# Altium PCB Madromys.PcbDoc (part 1 of 2)
Units mm, origin at the board's own origin, x right, y up, seen from the top; angles counter-clockwise.
Board outline 61.8 x 82.5 mm, 4 copper layers (Top Layer, Plane 1, Plane 2, Bottom Layer), stack 0.781 mm thick; 86 components, 51 nets, 306 pads, 237 vias.
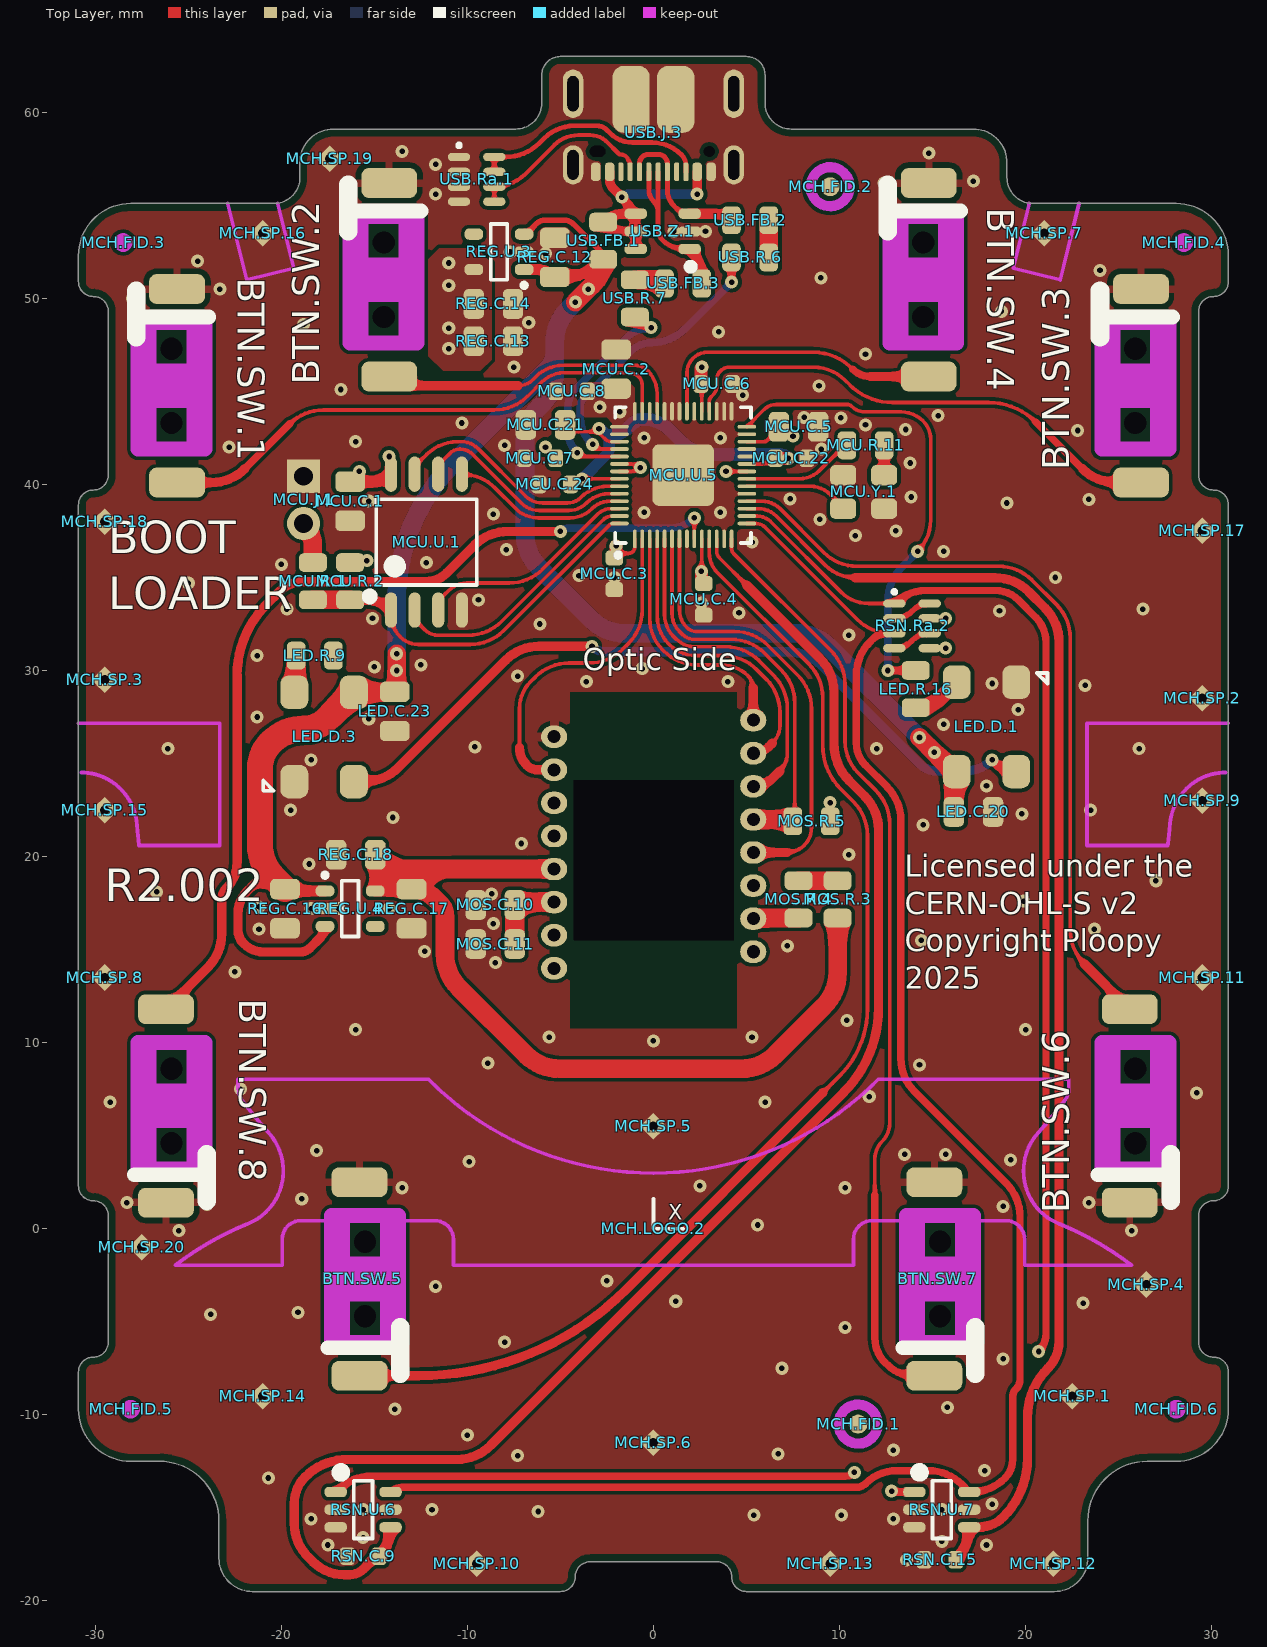
[diagram p0: Top Layer view]
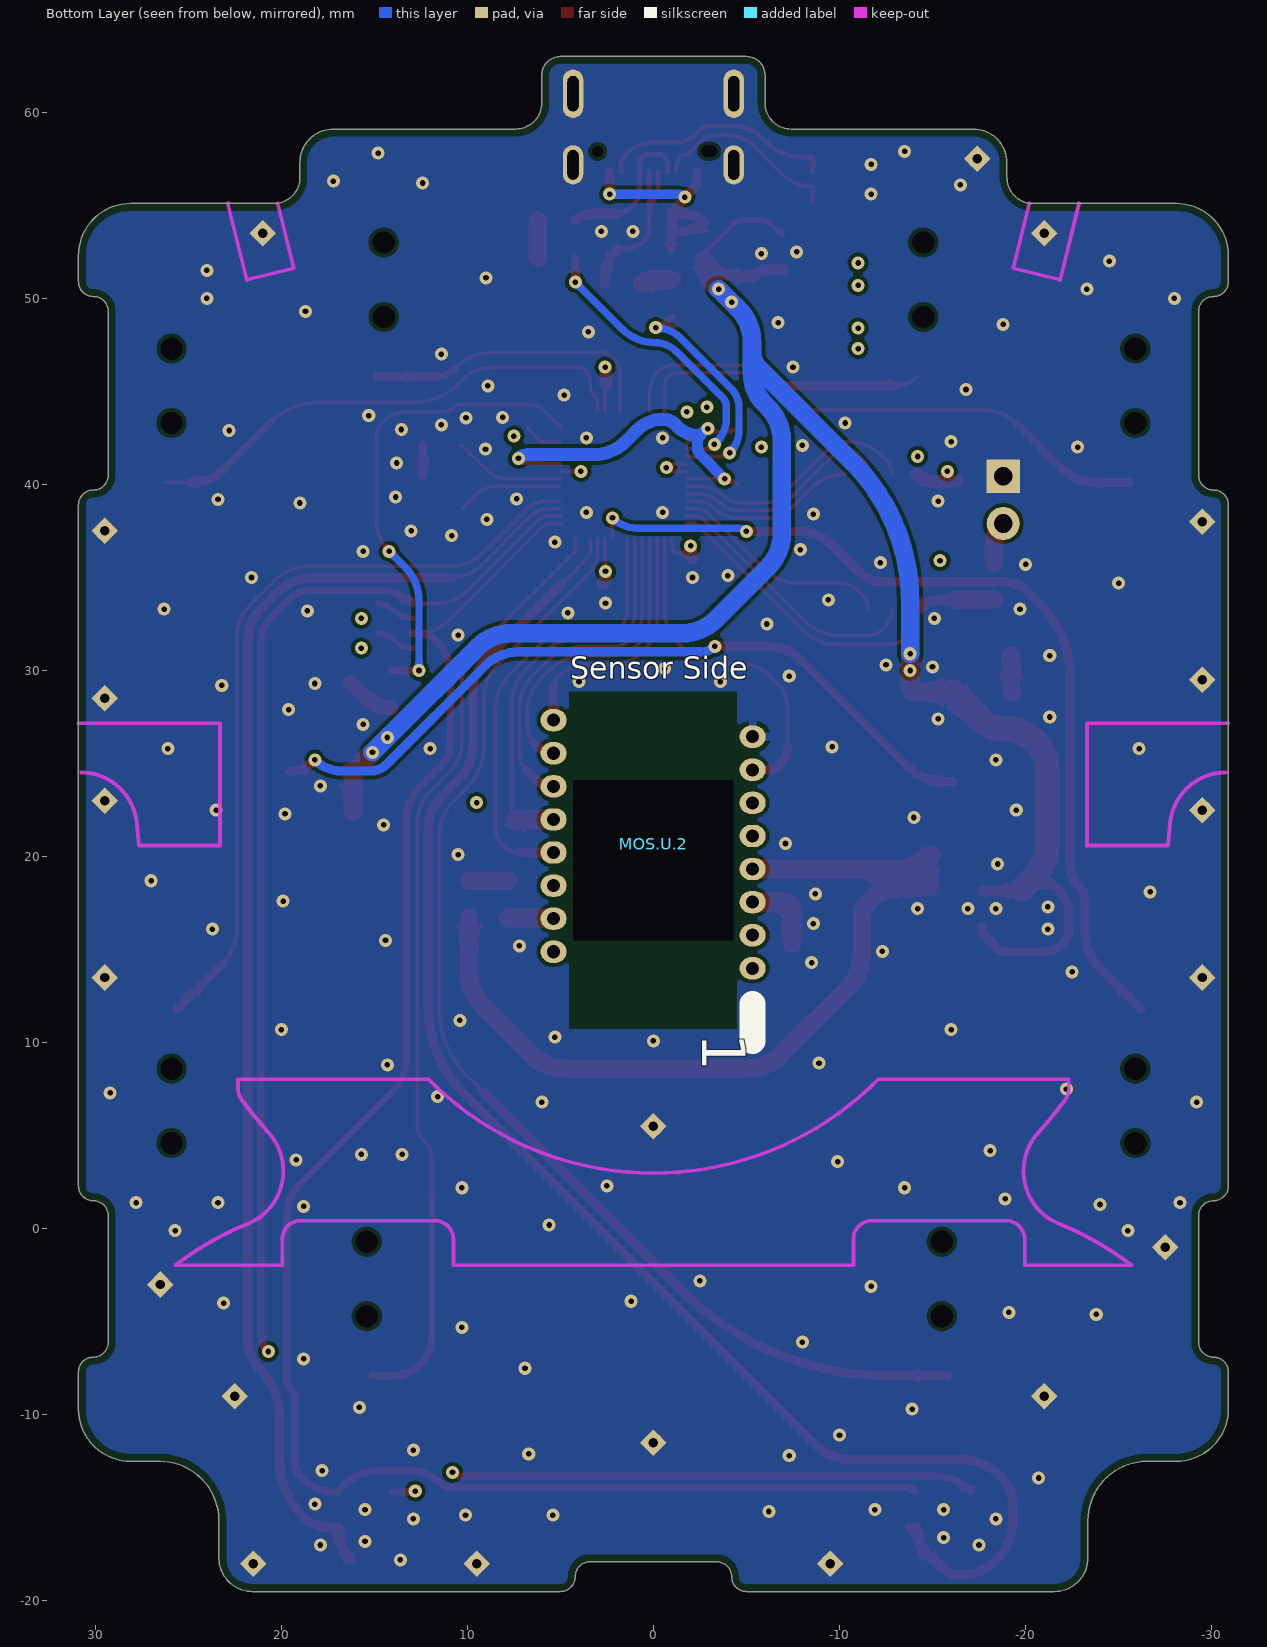
[diagram p1: Bottom Layer view, seen from below]
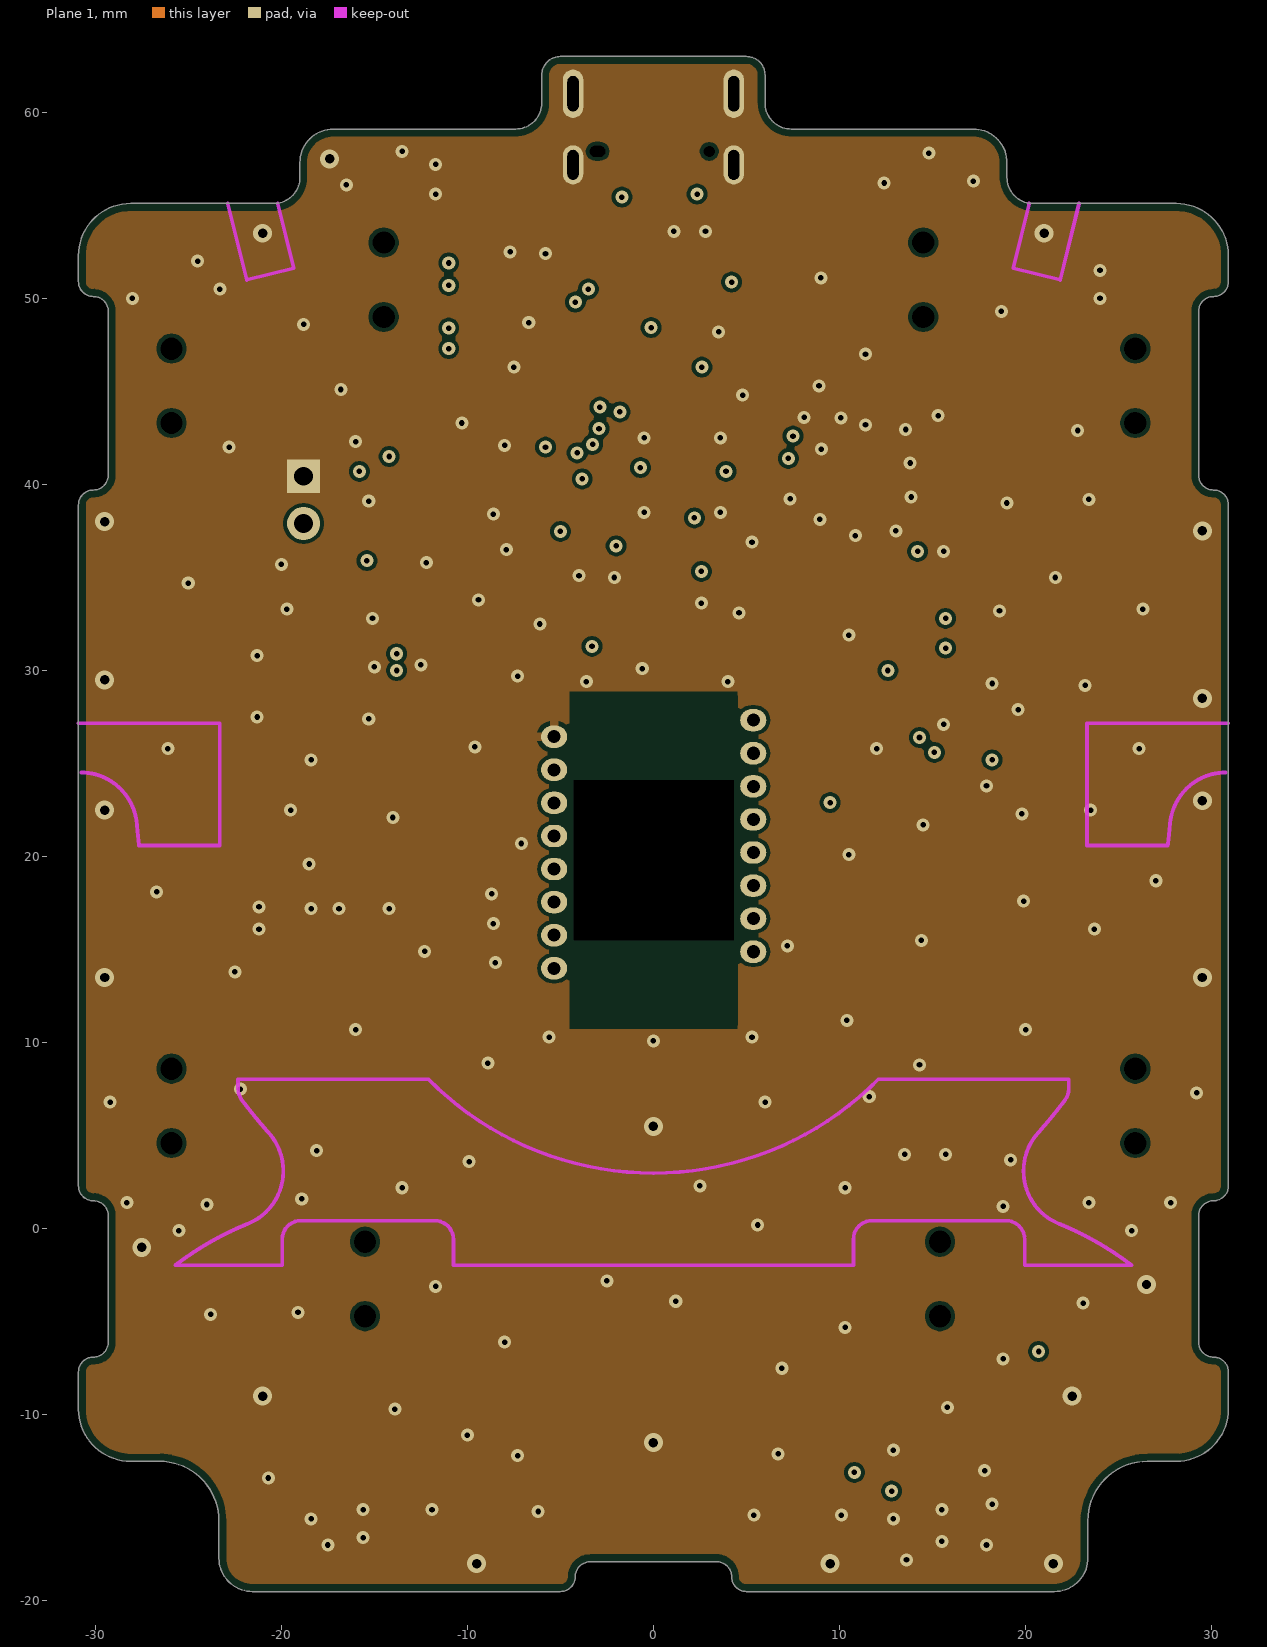
[diagram p2: Plane 1]
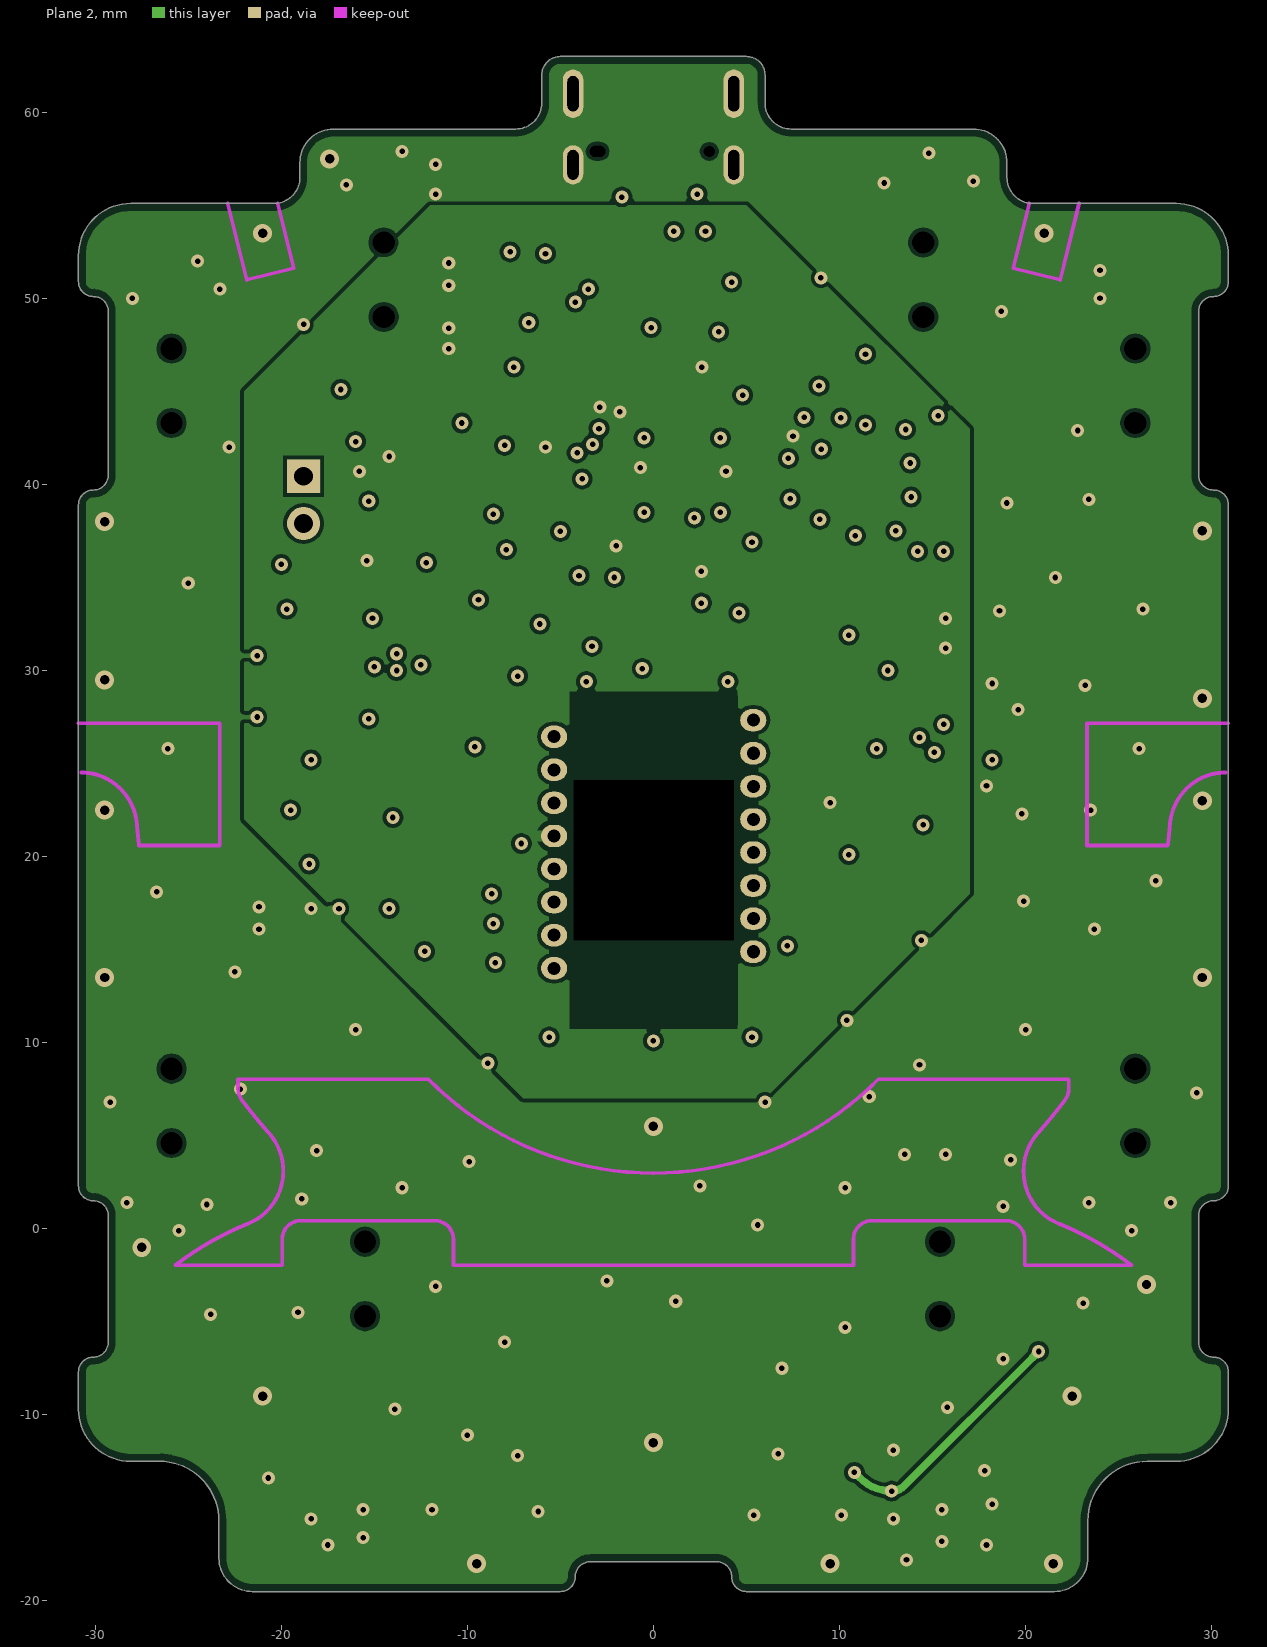
[diagram p3: Plane 2]

## Layer stack, top to bottom
Top Mask: solder mask 0.01, Solder Resist, Dk 3.5
Top Layer: signal copper 0.036
Dielectric 1: prepreg 0.127, FR-4, Dk 4.2
Plane 1: signal copper 0.036
Dielectric 4: core 0.383, Dk 4.2
Plane 2: signal copper 0.036
Dielectric 2: prepreg 0.127, Dk 4.2
Bottom Layer: signal copper 0.036
Bottom Solder: solder mask 0.01, Solder Resist, Dk 3.5

## Board outline
-30.9,-9.7 -30.9,-7.7 cw(c-30.1,-7.7) -30.1,-6.9 ccw(c-30.1,-6.1) -29.3,-6.1 -29.3,0.7 ccw(c-30.1,0.7) -30.1,1.5 cw(c-30.1,2.3) -30.9,2.3 -30.9,38.9 cw(c-30.1,38.9) -30.1,39.7 ccw(c-30.1,40.5) -29.3,40.5 -29.3,49.3 ccw(c-30.1,49.3) -30.1,50.1 cw(c-30.1,50.9) -30.9,50.9 -30.9,52.3 cw(c-28.1,52.3) -28.1,55.1 -20.4,55.1 ccw(c-20.4,56.5) -19,56.5 -19,57.3 cw(c-17.2,57.3) -17.2,59.1 -7.4,59.1 ccw(c-7.4,60.5) -6,60.5 -6,62 cw(c-5,62) -5,63 5,63 cw(c5,62) 6,62 6,60.5 ccw(c7.4,60.5) 7.4,59.1 17.2,59.1 cw(c17.2,57.3) 19,57.3 19,56.5 ccw(c20.4,56.5) 20.4,55.1 28.1,55.1 cw(c28.1,52.3) 30.9,52.3 30.9,50.9 cw(c30.1,50.9) 30.1,50.1 ccw(c30.1,49.3) 29.3,49.3 29.3,40.5 ccw(c30.1,40.5) 30.1,39.7 cw(c30.1,38.9) 30.9,38.9 30.9,2.3 cw(c30.1,2.3) 30.1,1.5 ccw(c30.1,0.7) 29.3,0.7 29.3,-6.1 ccw(c30.1,-6.1) 30.1,-6.9 cw(c30.1,-7.7) 30.9,-7.7 30.9,-9.7 cw(c28.1,-9.7) 28.1,-12.5 26.55,-12.5 ccw(c26.55,-15.7) 23.35,-15.7 23.35,-17.7 cw(c21.55,-17.7) 21.55,-19.5 5,-19.5 cw(c5,-18.7) 4.2,-18.7 ccw(c3.4,-18.7) 3.4,-17.9 -3.4,-17.9 ccw(c-3.4,-18.7) -4.2,-18.7 cw(c-5,-18.7) -5,-19.5 -21.55,-19.5 cw(c-21.55,-17.7) -23.35,-17.7 -23.35,-15.7 ccw(c-26.55,-15.7) -26.55,-12.5 -28.1,-12.5 cw(c-28.1,-9.7)

## Design rules (kind name [scope] priority, off if disabled: settings)
BoardOutlineClearance [(Not HasFootprint('SPARKGAP'))] p1: gap=0.4 ignorepadtopadclearanceinfootprint=FALSE except(0: Arc-SplitBarrior Arc-SplitContinuation Track-SplitBarrior Track-SplitContinuation Fill-SplitBarrior Fill-SplitContinuation Poly-SplitBarrior Poly-SplitContinuation Region-SplitBarrior Region-SplitContinuation Text-SplitBarrior Text-SplitContinuation)
Clearance "HighV Pads" [(InNetClass('HighV') AND (IsPad OR IsVia)) vs IsPad OR IsVia] p1: gap=0.4 ignorepadtopadclearanceinfootprint=FALSE except(0: Arc-Hole Track-Hole SMDPad-Hole THPad-Hole Via-Hole Fill-Hole Poly-Hole Region-Hole Text-Hole) // Establishes minimum clearance between bare pads that are high voltage, per IPC2221A Table 6-1, 51-100V, condition A6
Clearance Inter-Pad [IsPad vs IsPad] p2: gap=0.2 ignorepadtopadclearanceinfootprint=FALSE except(0: Arc-Hole Track-Hole SMDPad-Hole THPad-Hole Via-Hole Fill-Hole Poly-Hole Region-Hole Text-Hole)
Clearance "Spark Gaps" [InNetClass('Spark Gap') vs InNet('GND') And InPoly] p3: gap=0.635 ignorepadtopadclearanceinfootprint=FALSE except(0: Arc-Hole Track-Hole SMDPad-Hole THPad-Hole Via-Hole Fill-Hole Poly-Hole Region-Hole Text-Hole)
Clearance FIDs [Name like 'FID*'] p4: gap=1.016 ignorepadtopadclearanceinfootprint=FALSE except(0: Arc-Hole Track-Hole SMDPad-Hole THPad-Hole Via-Hole Fill-Hole Poly-Hole Region-Hole Text-Hole)
Clearance "Inner Planes" [InPoly AND OnMid] p5: gap=0.2 ignorepadtopadclearanceinfootprint=FALSE // Defines a larger clearance for planes on inner layers.
Clearance "All Planes" [InPoly] p6: gap=0.2 ignorepadtopadclearanceinfootprint=FALSE except(0: Arc-Hole Track-Hole SMDPad-Hole THPad-Hole Via-Hole Fill-Hole Poly-Hole Region-Hole Text-Hole) // Defines minimum clearance between planes on the same layer.
Clearance "Inner Layer Clearance" [OnMid vs OnMid] p7: gap=0.3 ignorepadtopadclearanceinfootprint=FALSE except(0: Arc-Hole Track-Hole SMDPad-Hole THPad-Hole Via-Hole Fill-Hole Poly-Hole Region-Hole Text-Hole) // We will give inner layers more spacing because they tend to be subject to stricter process limits.
Clearance [All] p8: gap=0.2 ignorepadtopadclearanceinfootprint=FALSE // 2 oz (70um) boards require at least 10mil spacing. We give a bit more to make sure things work well.
ComponentClearance "Terminal Block" [(HasFootprint('Phoenix 1933189 - Header')) vs (HasFootprint('Phoenix 1933189 - Header'))] p1: gap=-2.286 collisioncheckmode=3 verticalgap=0.254 showdistances=FALSE
ComponentClearance "FET/TP self Clearance" [(Name like 'Q*') Or (Name like 'TP*') vs (Name like 'Q*') Or (Name like 'TP*')] p2: gap=0.254 collisioncheckmode=3 verticalgap=0.254 showdistances=FALSE
ComponentClearance [Not ((Name like 'H*') Or (Name like 'FID*') Or (Name like 'SP*')) vs Not ((Name like 'H*') Or (Name like 'FID*') Or (Name like 'SP*'))] p3: gap=0.5 collisioncheckmode=3 verticalgap=0.5 showdistances=FALSE
DiffPairsRouting [All] p1: maxlimit=0.508 minlimit=0.279 mostfreqgap=0.381 toplayer_prefgap=0.279 toplayer_minwidth=0.279 toplayer_maxwidth=0.508 toplayer_prefwidth=0.381 midlayer2_mingap=0.305 midlayer2_minwidth=0.305 midlayer2_maxwidth=0.508 midlayer2_prefwidth=0.381 midlayer3_prefgap=0.279 midlayer3_minwidth=0.279 midlayer3_maxwidth=0.508 midlayer3_prefwidth=0.381 bottomlayer_prefgap=0.279 bottomlayer_minwidth=0.279 bottomlayer_maxwidth=0.508 bottomlayer_prefwidth=0.381 substack1={D919DD2D-F60F-4B9F-B5AE-F3E69D6E268F} toplayer_{d919dd2d-f60f-4b9f-b5ae-f3e69d6e268f}_minwidth=0.381 toplayer_{d919dd2d-f60f-4b9f-b5ae-f3e69d6e268f}_maxwidth=0.381 toplayer_{d919dd2d-f60f-4b9f-b5ae-f3e69d6e268f}_prefwidth=0.381 midlayer2_{d919dd2d-f60f-4b9f-b5ae-f3e69d6e268f}_minwidth=0.381 midlayer2_{d919dd2d-f60f-4b9f-b5ae-f3e69d6e268f}_maxwidth=0.381 midlayer2_{d919dd2d-f60f-4b9f-b5ae-f3e69d6e268f}_prefwidth=0.381 midlayer3_{d919dd2d-f60f-4b9f-b5ae-f3e69d6e268f}_minwidth=0.381 midlayer3_{d919dd2d-f60f-4b9f-b5ae-f3e69d6e268f}_maxwidth=0.381 midlayer3_{d919dd2d-f60f-4b9f-b5ae-f3e69d6e268f}_prefwidth=0.381 bottomlayer_{d919dd2d-f60f-4b9f-b5ae-f3e69d6e268f}_minwidth=0.381 bottomlayer_{d919dd2d-f60f-4b9f-b5ae-f3e69d6e268f}_maxwidth=0.381 bottomlayer_{d919dd2d-f60f-4b9f-b5ae-f3e69d6e268f}_prefwidth=0.381 maxuncoupledlength=12.7
Height [All] p1: minheight=0 maxheight=41 prefheight=12.7
HoleSize [All] p1: absolutevalues=TRUE maxlimit=100 minlimit=0.3 maxpercent=80.000 minpercent=20.000
HoleToHoleClearance [All] p1: gap=0.6 allowstackedmicrovias=TRUE
LayerPairs [All] p1: enforce=FALSE
MinimumSolderMaskSliver [All] p1: minsoldermaskwidth=0.09
NetAntennae [Not (HasFootprint('BALANCE_RESISTOR'))] p1: netantennaetolerance=0
PasteMaskExpansion [All] p1: expansion=-0.025
PlaneClearance [All] p1: clearance=0.3
PlaneConnect [All] p1: pad.planeconnectstyle=Relief pad.reliefexpansion=0.5 pad.reliefentries=4 pad.reliefconductorwidth=0.5 pad.reliefairgap=0.25 via.planeconnectstyle=Direct via.reliefexpansion=0.5 via.reliefentries=4 via.reliefconductorwidth=0.5 via.reliefairgap=0.25
PolygonConnect "PolygonConnect Spark Gap" [HasFootprint('SparkGap')] p1: connectstyle=Direct reliefconductorwidth=0.254 reliefentries=4 polygonreliefangle="90 Angle" airgapwidth=0.254 // This rule makes it so spark gaps get direct connections to ground planes.
PolygonConnect PolygonConnect_GND [All vs InNet('GND')] p2: connectstyle=Direct reliefconductorwidth=0.5 reliefentries=4 polygonreliefangle="90 Angle" airgapwidth=0.25 // This rule specifies all vias and holes connected to a GND plane have direct connections.
PolygonConnect [All] p3: connectstyle=Direct reliefconductorwidth=0.5 reliefentries=4 polygonreliefangle="90 Angle" airgapwidth=0.25
RoutingVias [All] p1: holewidth=0.5 width=1 viastyle="Through Hole" minholewidth=0.2 minwidth=0.5 maxholewidth=5.08 maxwidth=6.35
ShortCircuit [Not (InPadClass('TraceResistorPads')) vs Not (InPadClass('TraceResistorPads'))] p1: allowed=FALSE
SilkToBoardRegionClearance [All] p1 off:
SilkToSilkClearance [All] p1 off: silktosilkclearance=0.254
SilkToSolderMaskClearance SilkscreenOverComponentPads [IsPad] p1: minsilkscreentomaskgap=0.102 clearancetoexposedcopper=FALSE
SolderMaskExpansion SolderMaskExpansion_via [IsVia] p1: expansion=0.102 istentingtop=TRUE
SolderMaskExpansion [All] p2: expansion=0.076 istentingtop=FALSE
Width [All] p1: maxlimit=50.8 minlimit=0.2 preferedwidth=0.4 midlayer2_minwidth=0.35 midlayer3_minwidth=0.35 bottomlayer_minwidth=0.26 substack1={D919DD2D-F60F-4B9F-B5AE-F3E69D6E268F} toplayer_{d919dd2d-f60f-4b9f-b5ae-f3e69d6e268f}_minwidth=0.26 midlayer2_{d919dd2d-f60f-4b9f-b5ae-f3e69d6e268f}_minwidth=0.35 midlayer3_{d919dd2d-f60f-4b9f-b5ae-f3e69d6e268f}_minwidth=0.35 bottomlayer_{d919dd2d-f60f-4b9f-b5ae-f3e69d6e268f}_minwidth=0.26 minimp=50.000000 maximp=50.000000 favimp=50.000000
15 further rules are at their usual default settings.

## Classes and differential pairs
component class RSN: RSN.C.9 RSN.C.15 RSN.Ra.2 RSN.U.6 RSN.U.7
component class LED: LED.C.20 LED.C.23 LED.D.1 LED.D.3 LED.R.9 LED.R.16
component class BTN: BTN.SW.1 BTN.SW.2 BTN.SW.3 BTN.SW.4 BTN.SW.5 BTN.SW.6 BTN.SW.7 BTN.SW.8
component class USB: USB.FB.1 USB.FB.2 USB.FB.3 USB.J.3 USB.R.6 USB.R.7 USB.Ra.1 USB.Z.1
component class REG: REG.C.12 REG.C.13 REG.C.14 REG.C.16 REG.C.17 REG.C.18 REG.U.3 REG.U.4
component class MOS: MOS.C.10 MOS.C.11 MOS.R.3 MOS.R.4 MOS.R.5 MOS.U.2
component class MCU: MCU.C.1 MCU.C.2 MCU.C.3 MCU.C.4 MCU.C.5 MCU.C.6 MCU.C.7 MCU.C.8 MCU.C.21 MCU.C.22 MCU.C.24 MCU.J.1 MCU.R.1 MCU.R.2 MCU.R.11 MCU.U.1 MCU.U.5 MCU.Y.1
component class MCH: MCH.FID.1 MCH.FID.2 MCH.FID.3 MCH.FID.4 MCH.FID.5 MCH.FID.6 MCH.LOGO.2 MCH.SP.1 MCH.SP.2 MCH.SP.3 MCH.SP.4 MCH.SP.5 MCH.SP.6 MCH.SP.7 MCH.SP.8 MCH.SP.9 MCH.SP.10 MCH.SP.11 MCH.SP.12 MCH.SP.13 MCH.SP.14 MCH.SP.15 MCH.SP.16 MCH.SP.17 MCH.SP.18 MCH.SP.19 MCH.SP.20

## Components (designator, comment, footprint, x,y, rotation, side; value= is the part's Value field where it differs from the comment)
BTN.SW.1 "D2LS-21" D2LS-21 -25.9,45.3 r270 top (schematic designator SW1)
BTN.SW.2 "D2LS-21" D2LS-21 -14.5,51 r270 top (schematic designator SW2)
BTN.SW.3 "D2LS-21" D2LS-21 25.9,45.3 r270 top (schematic designator SW3)
BTN.SW.4 "D2LS-21" D2LS-21 14.5,51 r270 top (schematic designator SW4)
BTN.SW.5 "D2LS-21" D2LS-21 -15.5,-2.7 r90 top (schematic designator SW5)
BTN.SW.6 "D2LS-21" D2LS-21 25.9,6.6 r90 top (schematic designator SW6)
BTN.SW.7 "D2LS-21" D2LS-21 15.4,-2.7 r90 top (schematic designator SW7)
BTN.SW.8 "D2LS-21" D2LS-21 -25.9,6.6 r90 top (schematic designator SW8)
LED.C.20 "0805 X5R" "0805 - TALL" 17.2,22.4 r270 top value="0.1uF 100V" (schematic designator C20)
LED.C.23 "0805 X5R" "0805 - TALL" -13.9,27.8 r180 top value="0.1uF 100V" (schematic designator C23)
LED.D.1 "IN-PI55TATPRPGPB" IN-PI55TATPRPGPB 17.9,26.97 r90 top (schematic designator D1)
LED.D.3 "IN-PI55TATPRPGPB" IN-PI55TATPRPGPB -17.7,26.43 r270 top (schematic designator D3)
LED.R.9 "0805" 0805 -18.2,30.8 r270 top value="1k 1%" (schematic designator R9)
LED.R.16 "0805" 0805 14.1,29 r180 top value="1k 1%" (schematic designator R16)
MCH.FID.1 "IPC-7351 Fiducial 1mm" FIDUCIAL_1.5 11,-10.5 r90 top (schematic designator FID1)
MCH.FID.2 "IPC-7351 Fiducial 1mm" FIDUCIAL_1.5 9.5,56 r90 top (schematic designator FID2)
MCH.FID.3 "1mm Fiducial for OpenPNP" FIDUCIAL-NEW -28.5,53 r90 top (schematic designator FID3)
MCH.FID.4 "1mm Fiducial for OpenPNP" FIDUCIAL-NEW 28.5,53 r90 top (schematic designator FID4)
MCH.FID.5 "1mm Fiducial for OpenPNP" FIDUCIAL-NEW -28.1,-9.7 r90 top (schematic designator FID5)
MCH.FID.6 "1mm Fiducial for OpenPNP" FIDUCIAL-NEW 28.1,-9.7 r90 top (schematic designator FID6)
MCH.LOGO.2 "Coordinate system marker for assembly" "Coordinate System" 0,0 r0 top (schematic designator LOGO2)
MCH.SP.1 "Spark Gap" SparkGap 22.5,-9 r90 top (schematic designator SP1)
MCH.SP.2 "Spark Gap" SparkGap 29.5,28.5 r90 top (schematic designator SP2)
MCH.SP.3 "Spark Gap" SparkGap -29.5,29.5 r90 top (schematic designator SP3)
MCH.SP.4 "Spark Gap" SparkGap 26.5,-3 r90 top (schematic designator SP4)
MCH.SP.5 "Spark Gap" SparkGap 0,5.5 r90 top (schematic designator SP5)
MCH.SP.6 "Spark Gap" SparkGap 0,-11.5 r90 top (schematic designator SP6)
MCH.SP.7 "Spark Gap" SparkGap 21,53.5 r90 top (schematic designator SP7)
MCH.SP.8 "Spark Gap" SparkGap -29.5,13.5 r90 top (schematic designator SP8)
MCH.SP.9 "Spark Gap" SparkGap 29.5,23 r90 top (schematic designator SP9)
MCH.SP.10 "Spark Gap" SparkGap -9.5,-18 r90 top (schematic designator SP10)
MCH.SP.11 "Spark Gap" SparkGap 29.5,13.5 r90 top (schematic designator SP11)
MCH.SP.12 "Spark Gap" SparkGap 21.5,-18 r90 top (schematic designator SP12)
MCH.SP.13 "Spark Gap" SparkGap 9.5,-18 r90 top (schematic designator SP13)
MCH.SP.14 "Spark Gap" SparkGap -21,-9 r90 top (schematic designator SP14)
MCH.SP.15 "Spark Gap" SparkGap -29.5,22.5 r90 top (schematic designator SP15)
MCH.SP.16 "Spark Gap" SparkGap -21,53.5 r90 top (schematic designator SP16)
MCH.SP.17 "Spark Gap" SparkGap 29.5,37.5 r90 top (schematic designator SP17)
MCH.SP.18 "Spark Gap" SparkGap -29.5,38 r90 top (schematic designator SP18)
MCH.SP.19 "Spark Gap" SparkGap -17.4,57.5 r90 top (schematic designator SP19)
MCH.SP.20 "Spark Gap" SparkGap -27.5,-1 r90 top (schematic designator SP20)
MCU.C.1 "0805 X5R" "0805 - TALL" -16.3,39.1 r180 top value="1uF 25V" (schematic designator C1)
MCU.C.2 "0805 X5R" "0805 - TALL" -2,46.2 r0 top value="1uF 25V" (schematic designator C2)
MCU.C.3 "0603 X5R" "0603 capacitor - CAPC1608X06N" -2.1,35.2 r0 top value="0.1uF 25V" (schematic designator C3)
MCU.C.4 "0603 X5R" "0603 capacitor - CAPC1608X06N" 2.7,33.825 r0 top value="0.1uF 25V" (schematic designator C4)
MCU.C.5 "0805 X5R" "0805 - TALL" 7.8,43.1 r270 top value="1uF 25V" (schematic designator C5)
MCU.C.6 "0603 X5R" "0603 capacitor - CAPC1608X06N" 3.4,45.4 r90 top value="0.1uF 25V" (schematic designator C6)
MCU.C.7 "0603 X5R" "0603 capacitor - CAPC1608X06N" -6.1,41.4 r270 top value="0.1uF 25V" (schematic designator C7)
MCU.C.8 "0603 X5R" "0603 capacitor - CAPC1608X06N" -4.4,45 r270 top value="0.1uF 25V" (schematic designator C8)
MCU.C.21 "0805 X5R" "0805 - TALL" -5.8,43.2 r90 top value="1uF 25V" (schematic designator C21)
MCU.C.22 "0603 X5R" "0603 capacitor - CAPC1608X06N" 7.4,41.4 r90 top value="0.1uF 25V" (schematic designator C22)
MCU.C.24 "0603 X5R" "0603 capacitor - CAPC1608X06N" -5.3,40 r270 top value="0.1uF 25V" (schematic designator C24)
MCU.J.1 "HEADER2" 2x1 -18.8,40.44 r0 top (schematic designator J1)
MCU.R.1 "0805" 0805 -18.3,34.8 r0 top value="1k 1%" (schematic designator R1)
MCU.R.2 "0805" 0805 -16.3,34.8 r0 top value="10k 1%" (schematic designator R2)
MCU.R.11 "0805" 0805 11.4,42.1 r90 top value="1k 1%" (schematic designator R11)
MCU.U.1 "W25Q16JVSSIQ" "W25Q128JVS - SOIC127P790X216-8M" -12.2,36.9 r90 top (schematic designator U1)
MCU.U.5 "RP2040" "RP2040 - QFN40P700X700X90_HS-57M" 1.6,40.5 r90 top (schematic designator U5)
MCU.Y.1 "RH100-12.000-16-3030" RH100-12.000-16-3030 11.3,39.6 r0 top (schematic designator Y1)
MOS.C.10 "0805 X5R" "0805 - TALL" -8.5,17.4 r90 top value="10uF 25V" (schematic designator C10)
MOS.C.11 "0805 X5R" "0805 - TALL" -8.5,15.3 r90 top value="0.1uF 100V" (schematic designator C11)
MOS.R.3 "0805" 0805 9.9,17.7 r0 top value="22R 1%" (schematic designator R3)
MOS.R.4 "0805" 0805 7.8,17.7 r180 top value="22R 1%" (schematic designator R4)
MOS.R.5 "0805" 0805 8.5,21.9 r90 top value="10k 1%" (schematic designator R5)
MOS.U.2 "PMW3360DM-T2QU" PMW3360DM-T2QU -5.334,13.995 r270 bottom (schematic designator U2)
REG.C.12 "0805 X5R" "0805 - TALL" -5.3,52.2 r0 top value="1uF 25V" (schematic designator C12)
REG.C.13 "0805 X5R" "0805 - TALL" -8.6,47.7 r270 top value="10uF 25V" (schematic designator C13)
REG.C.14 "0805 X5R" "0805 - TALL" -8.6,49.7 r270 top value="1uF 25V" (schematic designator C14)
REG.C.16 "0805 X5R" "0805 - TALL" -19.8,17.2 r180 top value="1uF 25V" (schematic designator C16)
REG.C.17 "0805 X5R" "0805 - TALL" -13,17.2 r180 top value="10uF 25V" (schematic designator C17)
REG.C.18 "0805 X5R" "0805 - TALL" -16,20.1 r90 top value="1uF 25V" (schematic designator C18)
REG.U.3 "AP2202K-3.3" "AP2202 - SOT95P270X145-5N" -8.3,52.5 r180 top (schematic designator U3)
REG.U.4 "AP2204K-1.8" "AP2202 - SOT95P270X145-5N" -16.3,17.2 r0 top (schematic designator U4)
RSN.C.9 "0603 X5R" "0603 capacitor - CAPC1608X06N" -15.6,-17.6 r270 top value="0.1uF 25V" (schematic designator C9)
RSN.C.15 "0603 X5R" "0603 capacitor - CAPC1608X06N" 15.4,-17.8 r270 top value="0.1uF 25V" (schematic designator C15)
RSN.Ra.2 "1206 Quad" "4x 1k 1% - CAC-80P320X160-8M" 13.9,32.4 r0 top value="1k 1%" (schematic designator Ra2)
RSN.U.6 "TMAG5273" "TMAG5273 - SOT95P280X145-6M" -15.6,-15.1 r0 top (schematic designator U6)
RSN.U.7 "TMAG5273" "TMAG5273 - SOT95P280X145-6M" 15.5,-15.1 r0 top (schematic designator U7)
USB.FB.1 "ACML-0805-601-T" 0805 -2.7,53.1 r0 top value="Ferrite Bead 600R" (schematic designator FB1)
USB.FB.2 "ACML-0805-601-T" 0805 5.2,54.2 r90 top value="Ferrite Bead 600R" (schematic designator FB2)
USB.FB.3 "ACML-0805-601-T" 0805 1.6,50.8 r270 top value="Ferrite Bead 600R" (schematic designator FB3)
USB.J.3 "DX07S016JA1R1500" DX07S016JA1R1500 0,59.8 r180 top (schematic designator J3)
USB.R.6 "0805" 0805 5.198,52.2 r270 top value="22R 1%" (schematic designator R6)
USB.R.7 "0805" 0805 -1,50 r0 top value="22R 1%" (schematic designator R7)
USB.Ra.1 "1206 Quad" "4x 10k 1% - CAC-80P320X160-8M" -9.5,56.4 r0 top value="10k 1%" (schematic designator Ra1)
USB.Z.1 "IP4220CZ6,125" "PESD3V3S4UD - SOT95P275X110-6N" 0.5,53.6 r180 top (schematic designator Z1)

## Footprints (in the part's own frame and the unit in brackets; to place one, negate y for a bottom-side part, rotate by r counter-clockwise, add the part's x,y. Pads: shape width x height; smd on the part's side, far side on the other; paste and mask are expansions set on the pad)
2x1 [mil]
  rect 70x70 hole 40 paste-3897.64: 1(0,0)
  round 70 hole 40 paste-3897.64: 2(0,-100)
  body extent -50,-150 50,50, height 339
"4x 1k 1% - CAC-80P320X160-8M" [mm] "Chip Array, Concave, 8-Leads, Pitch 0.80mm,  Body 3.20x1.60mm,  IPC Low Density"
  oval 1.2x0.45 smd paste-99: 1(-0.95,1.2) 2(-0.95,0.4) 3(-0.95,-0.4) 4(-0.95,-1.2) 5(0.95,-1.2) 6(0.95,-0.4) 7(0.95,0.4) 8(0.95,1.2)
  silkscreen extent -1,1.78 -0.9,1.87, body extent -0.9,-1.7 0.9,1.7, height 0.6
"4x 10k 1% - CAC-80P320X160-8M" [mm] "Chip Array, Concave, 8-Leads, Pitch 0.80mm,  Body 3.20x1.60mm,  IPC Low Density"
  oval 1.2x0.45 smd paste-99: 1(-0.95,1.2) 2(-0.95,0.4) 3(-0.95,-0.4) 4(-0.95,-1.2) 5(0.95,-1.2) 6(0.95,-0.4) 7(0.95,0.4) 8(0.95,1.2)
  silkscreen extent -1,1.78 -0.9,1.87, body extent -0.9,-1.7 0.9,1.7, height 0.6
"0603 capacitor - CAPC1608X06N" [mm] "Chip Capacitor, 2-Leads, Body 1.60x0.80mm, IPC Medium Density"
  rrect50% 0.95x0.8 smd: 1(0,-0.85) 2(0,0.85)
  body extent -0.45,-0.85 0.45,0.85, height 0.6
0805 [mm] "Chip Capacitor, 2-Leads, Body 2.0x1.3mm, IPC Medium Density"
  rrect50% 1.5x1 smd paste+0: 1(0,1.002) 2(0,-1.002)
  body extent -0.72,-1.1 0.72,1.1, height 0.8
"0805 - TALL" [mm] "Same as 0805 footprint, but solder mask is adjusted to leave more paste behind for tall (>0.9mm) components like big caps, which tend to be solder-starved on the regular footprint."
  rrect50% 1.6x1.1 smd paste+0: 1(0,1.052) 2(0,-1.052)
  body extent -0.72,-1.1 0.72,1.1, height 0.8
"AP2202 - SOT95P270X145-5N" [mm] "SOT23, 5-Leads, Body 2.92x2.70mm, Pitch 0.95mm, IPC Medium Density"
  rrect80% 1x0.6 smd paste-0.04: 1(-1.35,0.95) 2(-1.35,0) 3(-1.35,-0.95) 4(1.35,-0.95) 5(1.35,0.95)
  silkscreen extent -1.48,-1.5 0.45,1.92, body extent -0.85,-1.52 0.85,1.52, height 1.45
"Coordinate System" [mm]
  silkscreen extent 0,0 1.6,1.6
D2LS-21 [mm]
  rrect50% 1.6x3 smd paste-0.04: A(-5.2,0.3) B(5.2,0.3)
  round 0 hole 1.2 unplated: ""(-2,0) ""(2,0)
  Top Layer keep-out lines w0.8: -0.8,-1.8 -0.8,1.8 ; 0.8,-1.7 0.8,1.8 ; 0,-1.7 0,1.8 ; 3.4,-1.2 -3.4,-1.2 ; 3.4,1.2 -3.4,1.2 ; 3.4,-1.8 -3.4,-1.8 -3.4,1.8 3.4,1.8 3.4,-1.8
  silkscreen extent -5.1,-2 -2.6,2, body extent -5.6,-2.4 5.6,2.4, height 3.19
DX07S016JA1R1500 [mm] "USB-C (USB TYPE-C) USB 2.0 Receptacle Connector 24 (16+8 Dummy) Position Surface Mount, Right Angle; Through Hole"
  rrect70% 0.5x1 smd paste-0.04 mask+0.05: 1(-3.1,3) 2(-2.35,3) 11(2.35,3) 12(3.1,3)
  rrect70% 0.27x1 smd paste-0.02 mask+0.05: 3(-1.75,3) 4(-1.25,3) 5(-0.75,3) 6(-0.25,3) 7(0.25,3) 8(0.75,3) 9(1.25,3) 10(1.75,3)
  rrect100% 1.1x2.6 hole 0.6 slot 1.9 at 90 deg paste-99 mask+0.1: SHELL(-4.32,-1.2) SHELL(4.32,-1.2)
  rrect100% 1.1x2.1 hole 0.6 slot 1.6 at 90 deg paste-99 mask+0.1: SHELL(-4.32,2.625) SHELL(4.32,2.625)
  rrect60% 2x3.6 smd paste-0.12 mask+0.05: SHELL(-1.2,-0.9) SHELL(1.2,-0.9)
  round 0 hole 0.6: ""(-3,1.9)
  round 0 hole 0.6 slot 0.85 at 0 deg: ""(3,1.9)
  body extent -4.47,-3.65 4.47,3.25, height 3.18
FIDUCIAL-NEW [mm]
  Top Layer keep-out circle w0.6: c0,0 r0.2
FIDUCIAL_1.5 [mil]
  round 40 smd paste-60 mask+30: 1(0,0)
  Top Layer keep-out circle w21.65: c0,0 r41.34
IN-PI55TATPRPGPB [mm]
  rrect60% 1.8x1.5 smd paste-0.04 mask+0.06: 1(-2.4,1.6) 2(-2.4,-1.6) 3(2.4,-1.6) 4(2.4,1.6)
  silkscreen extent 2.32,-3.27 2.9,-2.7, body extent -2.5,-2.5 2.5,2.5, height 1.6
"PESD3V3S4UD - SOT95P275X110-6N" [mm] "SOT23, 6-Leads, Body 2.90x2.75mm, Pitch 0.95mm, IPC Medium Density"
  rrect80% 1.2x0.55 smd paste-0.03 mask+0.085: 1(-1.45,0.95) 2(-1.45,0) 3(-1.45,-0.95) 4(1.45,-0.95) 5(1.45,0) 6(1.45,0.95)
  silkscreen extent -1.63,1.78 -1.38,2.02, body extent -0.85,-1.55 0.85,1.55, height 1.1
PMW3360DM-T2QU [mm]
  oval 1.2x1.4 hole 0.7: 1(0,0) 2(-1.778,0) 3(-3.556,0) 4(-5.334,0) 5(-7.112,0) 6(-8.89,0) 7(-10.668,0) 8(-12.446,0) 9(-13.335,-10.7) 10(-11.557,-10.7) 11(-9.779,-10.7) 12(-8.001,-10.7) 13(-6.223,-10.7) 14(-4.445,-10.7) 15(-2.667,-10.7) 16(-0.889,-10.7)
  rect 0x0 hole 8.6 square unplated: ""(-5.8,-5.35)
  silkscreen extent 1.92,0 3.9,0, body extent -16.06,-14.76 5.09,4.09, height 2.44
RH100-12.000-16-3030 [mm] "3.2mm x 2.5mm crystal"
  rrect50% 1.4x1.1 smd paste-0.1: 1(-1.1,-0.9) 2(1.1,-0.9) 3(1.1,0.9) 4(-1.1,0.9)
  body extent -1.6,-1.25 1.6,1.25, height 1
"RP2040 - QFN40P700X700X90_HS-57M" [mm] "QFN, 56-Leads, Body 7.00x7.00mm, Pitch 0.40mm, Thermal Pad 3.10x3.10mm, IPC Low Density"
  oval 1x0.2 smd paste-99 mask+0.05: 1(-3.425,2.6) 2(-3.425,2.2) 3(-3.425,1.8) 4(-3.425,1.4) 5(-3.425,1) 6(-3.425,0.6) 7(-3.425,0.2) 8(-3.425,-0.2) 9(-3.425,-0.6) 10(-3.425,-1) 11(-3.425,-1.4) 12(-3.425,-1.8) 13(-3.425,-2.2) 14(-3.425,-2.6) 29(3.425,-2.6) 30(3.425,-2.2) 31(3.425,-1.8) 32(3.425,-1.4) 33(3.425,-1) 34(3.425,-0.6) 35(3.425,-0.2) 36(3.425,0.2) 37(3.425,0.6) 38(3.425,1) 39(3.425,1.4) 40(3.425,1.8) 41(3.425,2.2) 42(3.425,2.6)
  oval 0.2x1 smd paste-99 mask+0.05: 15(-2.6,-3.425) 16(-2.2,-3.425) 17(-1.8,-3.425) 18(-1.4,-3.425) 19(-1,-3.425) 20(-0.6,-3.425) 21(-0.2,-3.425) 22(0.2,-3.425) 23(0.6,-3.425) 24(1,-3.425) 25(1.4,-3.425) 26(1.8,-3.425) 27(2.2,-3.425) 28(2.6,-3.425) 43(2.6,3.425) 44(2.2,3.425) 45(1.8,3.425) 46(1.4,3.425) 47(1,3.425) 48(0.6,3.425) 49(0.2,3.425) 50(-0.2,3.425) 51(-0.6,3.425) 52(-1,3.425) 53(-1.4,3.425) 54(-1.8,3.425) 55(-2.2,3.425) 56(-2.6,3.425)
  rrect20% 3.3x3.3 smd paste-99: 57(0,0)
  silkscreen extent -4.42,-3.65 3.65,3.65, body extent -3.5,-3.5 3.5,3.5, height 0.9
SparkGap [mil]
  rect 40x40 smd rot 45 paste-99 mask+4: 1(0,0)
  rect 40x40 smd far side rot 45 paste-99 mask+4: 1(0,0)
"TMAG5273 - SOT95P280X145-6M" [mm] "SOT23, 6-Leads, Body 2.90x2.80mm, Pitch 0.95mm, IPC Low Density"
  rrect80% 1.2x0.55 smd paste-0.05: 1(-1.475,0.95) 2(-1.475,0) 3(-1.475,-0.95) 4(1.475,-0.95) 5(1.475,0) 6(1.475,0.95)
  silkscreen extent -1.45,-1.55 0.5,2.25, body extent -0.88,-1.52 0.87,1.53, height 1.45
"W25Q128JVS - SOIC127P790X216-8M" [mm] "SOIC, 8-Leads, Body 5.28x5.28mm, Pitch 1.27mm, IPC Low Density"
  oval 1.9x0.65 smd paste-0.05: 1(-3.65,1.905) 2(-3.65,0.635) 3(-3.65,-0.635) 4(-3.65,-1.905) 5(3.65,-1.905) 6(3.65,-0.635) 7(3.65,0.635) 8(3.65,1.905)
  silkscreen extent -3.05,-2.7 2.3,3.17, body extent -2.7,-2.7 2.7,2.7, height 2.16

## Part data
BTN.SW.1 BTN.SW.2 BTN.SW.3 BTN.SW.4 BTN.SW.5 BTN.SW.6 BTN.SW.7 BTN.SW.8: "Compact Surface-mounting Switch for long durability", Supplier Part Number 1=Z4378CT-ND, Supplier 1=Digi-Key, Supplier 2=Mouser, Supplier Part Number 2=653-D2LS-21
LED.C.20 LED.C.23 MOS.C.11: library part "Cap 0.1uF 100V", "0805, X5R or better", Supplier Part Number 1=1276-6840-2-ND, Supplier 1=Digi-Key
LED.D.1 LED.D.3: "ADDRESS LED DISCRETE SERIAL RGB", Supplier Part Number 1=1830-1204-1-ND, Supplier 1=Digi-Key, Supplier 2=Arrow, Supplier 3=Mouser, Supplier Part Number 2=IN-PI55TATPRPGPB, Supplier Part Number 3=743-IN-PI55TATPRPGPB
LED.R.9 LED.R.16 MCU.R.1 MCU.R.11: library part "Res 1k 1% 0805", "Chip resistor, 1/8W 100PPM", Supplier Part Number 1=RMCF0805FT1K00TR-ND, Supplier 1=Digi-Key
MCH.FID.1 MCH.FID.2: library part FIDUCIAL_1.5, PNP-A=1, PNP-da=0, PNP-dx=0, PNP-dy=0, PNP-FeedType=Fiducial, PNP-Level=1, PNP-Lv=1, PNP-Nzl=2, PNP-PlacePriority=0, PNP-Pt=0, PNP-TapeIndex=0, PNP-TapeWidth=0, PNP-Thk=1.02, PNP-TS=70, PNP-Type=MARK1, PNP-Voff=0, PNP-W=0, PNP-X=4, PNP-Y=4
MCH.FID.3 MCH.FID.4 MCH.FID.5 MCH.FID.6: library part FIDUCIAL_NEW, "This fiducial is designed to work with OpenPNP. It presents a circular pattern under the solder mask, to prevent glare issues from messing with the detection.", PNP-A=1, PNP-da=0, PNP-dx=0, PNP-dy=0, PNP-FeedType=Fiducial, PNP-Level=1, PNP-Lv=1, PNP-Nzl=2, PNP-PlacePriority=0, PNP-Pt=0, PNP-TapeIndex=0, PNP-TapeWidth=0, PNP-Thk=1.02, PNP-TS=70, PNP-Type=MARK1, PNP-Voff=0, PNP-W=0, PNP-X=4, PNP-Y=4
MCH.LOGO.2: library part CoordinateSystem
MCH.SP.1 MCH.SP.2 MCH.SP.3 MCH.SP.4 MCH.SP.5 MCH.SP.6 MCH.SP.7 MCH.SP.8 MCH.SP.9 MCH.SP.10 MCH.SP.11 MCH.SP.12 MCH.SP.13 MCH.SP.14 MCH.SP.15 MCH.SP.16 MCH.SP.17 MCH.SP.18 MCH.SP.19 MCH.SP.20: "Open square pad for spark gapping", PNP-A=0, PNP-da=0, PNP-dx=0, PNP-dy=0, PNP-FeedType=Tape, PNP-Level=1, PNP-Lv=1, PNP-Nzl=2, PNP-PlacePriority=1, PNP-Pt=0, PNP-TapeIndex=1, PNP-TapeWidth=8, PNP-Thk=1, PNP-TS=70, PNP-Type=CHI, PNP-Voff=0, PNP-W=0, PNP-X=1, PNP-Y=1
MCU.C.1 MCU.C.2 MCU.C.5 MCU.C.21 REG.C.12 REG.C.14 REG.C.16 REG.C.18: library part "Cap 1uF 25V", "0805, X5R or better", Supplier Part Number 1=1276-1066-2-ND, Supplier 1=Digi-Key, Supplier 2=Digi-Key, Supplier Part Number 2=1276-1066-1-ND
MCU.C.3 MCU.C.4 MCU.C.6 MCU.C.7 MCU.C.8 MCU.C.22 MCU.C.24 RSN.C.9 RSN.C.15: library part "Cap 0.1uF 25V", "0603, X5R or better", Supplier Part Number 1=1276-6840-2-ND, Supplier 1=Digi-Key
MCU.J.1: "2-pin 0.100\" header", Supplier Part Number 1=855-M20-9990245, Supplier 1=Mouser, Supplier 2=Digi-Key, Supplier Part Number 2=952-2261-ND
MCU.R.2 MOS.R.5: library part "Res 10k 1% 0805", "Chip resistor", Supplier Part Number 1=RMCF0805FT10K0TR-ND, Supplier 1=Digi-Key
MCU.U.1: Supplier Part Number 1=W25Q16JVSSIQ-ND, Supplier 1=Digi-Key
MCU.U.5: Supplier Part Number 1=49AJ8740, Supplier 1=Newark
MCU.Y.1: "12MHz Crystal 16pF 100 Ohms 4-SMD, No Lead (3.2mm x 2.5mm)", Supplier Part Number 1=XC2686CT-ND, Supplier 1=Digi-Key, Supplier 2=Mouser, Supplier Part Number 2=520-160-12-30B-AGMT
MOS.C.10 REG.C.13 REG.C.17: library part "Cap 10uF 25V", "0805, X5R or better", Supplier Part Number 1=81-GRM21BR61E106KA3L, Supplier 1=Mouser, Supplier 2=Digi-Key, Supplier Part Number 2=490-5523-1-ND
MOS.R.3 MOS.R.4 USB.R.6 USB.R.7: library part "Res 22R 1% 0805", "Chip resistor", Supplier Part Number 1=RMCF0805FT22R0CT-ND, Supplier 1=Digi-Key, Supplier 2=Arrow, Supplier Part Number 2=RMCF0805FT22R0
MOS.U.2: "Optical Gaming Navigation Sensor"
REG.U.3: "3.3V 150mA LDO regulator", Supplier Part Number 1=621-AP2202K-3.3TRG1, Supplier 1=Mouser, Supplier 2=Digi-Key, Supplier 3=Arrow, Supplier Part Number 2=AP2202K-3.3TRG1DICT-ND, Supplier Part Number 3=PWagzdsTFFHKE_U17B45SP-NtndBrheJIaI5hB7gHD0ZVywxIBNyoAQstvnyfZZ0
REG.U.4: "Linear Voltage Regulator IC 1 Output 150mA SOT-23-5", Supplier Part Number 1=AP2204K-1.8TRG1DICT-ND, Supplier 1=Digi-Key, Supplier 2=Mouser, Supplier Part Number 2=621-AP2204K-1.8TRG1
RSN.Ra.2: library part "Quad Res 1k 1% 1206", "Chip resistor"
RSN.U.6 RSN.U.7: "Low-Power Linear 3D Hall-Effect Sensor With I2C Interface"
USB.FB.1 USB.FB.2 USB.FB.3: "FERRITE BEAD 600 OHM 0805 1LN", Supplier Part Number 1=535-12556-1-ND, Supplier 1=Digi-Key
USB.J.3: "USB-C (USB TYPE-C) USB 2.0 Receptacle Connector 24 (16+8 Dummy) Position Surface Mount, Right Angle; Through Hole", Supplier Part Number 1=670-DX07S016JA1R1500CT-ND, Supplier 1=Digi-Key, Supplier 2=Mouser, Supplier Part Number 2=656-DX07S016JA1R1500
USB.Ra.1: library part "Quad Res 10k 1% 1206", "Chip resistor"
USB.Z.1: "TVS DIODE 5.5V 6TSOP (Low capacitance, USB)", Supplier Part Number 1=1727-3578-1-ND, Supplier 1=Digi-Key, Supplier 2=Mouser, Supplier 3=Arrow, Supplier Part Number 2=771-IP4220CZ6-T/R, Supplier Part Number 3=IP4220CZ6,125

## Via types
v1: diameter 0.7, hole 0.3, Top Layer to Bottom Layer, tented both sides, 217 vias
v2: diameter 1.016, hole 0.508, Top Layer to Bottom Layer, tented both sides, 20 vias

## Nets (pads, with @x,y where several pads share a name; then routed paths per layer and width w, separated by ;. In a path a pad name is that pad's centre, name@x,y a point inside that pad or via, vN(x,y) a via of type N, cw(c..) or ccw(c..) an arc to the next point about the centre after c; other vN are vias at no path point)
1V1: MCU.C.21.2 MCU.C.22.2 MCU.C.24.2 MCU.U.5.23 MCU.U.5.45 MCU.U.5.50 | length 22.4
  Top Layer w0.2: MCU.C.21.2@-4.748,43.2 ccw(c-3.842,44.105) -3.842,42.825 -3.225,42.825 cw(c-3.225,42.221) -2.798,42.648 -2.575,42.425 ccw(c-2.273,42.727) -2.273,42.3 MCU.U.5.45@-1.825,42.3 ; MCU.C.24.2@-4.45,40 cw(c-3.726,39.276) -3.726,40.3 MCU.U.5.50@-1.825,40.3 ; MCU.U.5.23@5.025,41.1 5.826,41.1 ccw(c5.826,42.124) MCU.C.22.2@6.55,41.4
  Top Layer w0.7: MCU.C.22.2@6.55,41.4 v1(7.25,41.4)
  Bottom Layer w0.6: v1(-3.826,40.3) -2.551,41.575 ccw(c-2.977,42) -2.375,42 -2.375,42.384 ccw(c-2.716,42.384) -2.475,42.625 -2.797,42.947 ccw(c-2.925,42.819) v1(-2.925,43)
  Bottom Layer w0.7: -2.475,42.625 -2.447,42.625 ccw(c-2.447,44.247) -1.3,43.1 -1.183,43.217 cw(c-0.5,42.534) -0.5,43.5 cw(c-0.5,41.569) 0.866,42.934 1.493,42.307 ccw(c3.2,44.014) 3.2,41.6 6.767,41.6 cw(c6.767,40.917) v1(7.25,41.4)
1V8: MOS.R.3.2 MOS.U.2.4 REG.C.17.2 REG.C.18.2 REG.U.4.5 | length 54.6
  Top Layer w0.6: REG.C.18.2@-14.948,20.1 -14.95,20.098 REG.U.4.5@-14.95,18.15 -13.247,18.15 ccw(c-13.247,18.499) REG.C.17.2@-13,18.252
  Top Layer w1: MOS.U.2.4@-5.334,19.329 -10.871,19.329 ; MOS.R.3.2@9.9,16.698 9.9,13.752 cw(c7.36,13.752) 9.156,11.956 6.544,9.344 cw(c4.748,11.14) 4.748,8.6 -5.048,8.6 cw(c-5.048,11.14) -6.844,9.344 -10.456,12.956 cw(c-8.66,14.752) -11.2,14.752 -11.2,16.776 ccw(c-12.224,16.776) -11.5,17.5 -11.724,17.724 ccw(c-13,16.448) REG.C.17.2@-13,18.252 -12.667,18.585 cw(c-10.871,16.789) -10.871,19.329 ; -11.998,19.329 cw(c-13.758,21.089) -13.758,18.6 -14.525,18.6 -14.525,19.08 ccw(c-15.968,19.08) -14.947,20.1 -14.921,20.073 ccw(c-13.124,21.869) -13.124,19.329 -11.998,19.329 ; -11.998,19.329 -10.871,19.329
3V3: MCU.C.1.2 MCU.C.2.2 MCU.C.3.2 MCU.C.4.2 MCU.C.5.2 MCU.C.6.2 MCU.C.7.2 MCU.C.8.2 MCU.R.2.1 MCU.U.1.8 MCU.U.5.1 MCU.U.5.10 MCU.U.5.22 MCU.U.5.26 MCU.U.5.33 MCU.U.5.42 MCU.U.5.43 MCU.U.5.44 MCU.U.5.48 MCU.U.5.49 MOS.R.5.2 MOS.U.2.5 REG.C.13.2 REG.C.14.2 REG.U.3.5 RSN.Ra.2.5 RSN.Ra.2.7 | length 16
  Top Layer w0.2: MCU.C.3.2@-2,36.291 -1.362,36.291 ccw(c-1.362,36.662) -1.1,36.4 ccw(c-1.342,36.642) -1,36.642 MCU.U.5.1@-1,37.075 ; MCU.U.5.49@-1.825,40.7 -1.183,40.7 ccw(c-1.183,41.383) v1@-0.964,40.736 ; MCU.U.5.48@-1.825,41.1 -1.183,41.1 cw(c-1.183,40.417) v1(-0.7,40.9) ; MCU.C.6.2@2.55,45.4 cw(c2.429,45.279) 2.6,45.279 MCU.U.5.33@2.6,43.925 ; MCU.U.5.10@2.6,37.075 2.6,34.916 ccw(c2.941,34.916) MCU.C.4.2@2.7,34.675 ; v1(3.9,40.7) MCU.U.5.22@5.025,40.7 ; MCU.U.5.26@5.025,42.3 5.944,42.3 ccw(c5.944,42.556) 6.125,42.375 ; 6.125,42.375 6.675,42.925 ccw(c6.5,43.1) MCU.C.5.2@6.748,43.1 ; v1@-0.964,40.736 ccw(c-1.183,41.383) v1(-0.7,40.9) ; v1@-0.964,40.736 -0.871,40.829 cw(c-0.7,40.659) v1(-0.7,40.9)
  Top Layer w0.65: MCU.C.1.2@-16.3,40.152 -15.065,40.152 ccw(c-15.065,41.51) MCU.U.1.8@-14.105,40.55
  Top Layer w0.7: MCU.C.3.2@-2.1,36.05 ccw(c-2.341,36.291) -2,36.291 v1(-2,36.7) ; MCU.C.6.2@2.55,45.4 2.55,46.179 cw(c2.721,46.179) v1(2.6,46.3) ; v1(2.575,35.325) 2.575,34.977 ccw(c3.002,34.977) MCU.C.4.2@2.7,34.675
  other v1: 9.5,22.9 15.7,31.2 15.7,32.8 -15.4,35.9 -15.8,40.7 -14.2,41.5 -5.8,42 7.5,42.6 -1.8,43.9 -2.875,44.15 -11,47.3 -11,48.4 -11,50.7 -11,51.9
GND: BTN.SW.1.A BTN.SW.2.A BTN.SW.3.A BTN.SW.4.A BTN.SW.5.B BTN.SW.6.A BTN.SW.7.B BTN.SW.8.A LED.C.20.1 LED.C.23.1 LED.D.1.3 LED.D.3.3 MCH.SP.1.1 MCH.SP.2.1 MCH.SP.3.1 MCH.SP.4.1 MCH.SP.5.1 MCH.SP.6.1 MCH.SP.7.1 MCH.SP.8.1 MCH.SP.9.1 MCH.SP.10.1 MCH.SP.11.1 MCH.SP.12.1 MCH.SP.13.1 MCH.SP.14.1 MCH.SP.15.1 MCH.SP.16.1 MCH.SP.17.1 MCH.SP.18.1 MCH.SP.19.1 MCH.SP.20.1 MCU.C.1.1 MCU.C.2.1 MCU.C.3.1 MCU.C.4.1 MCU.C.5.1 MCU.C.6.1 MCU.C.7.1 MCU.C.8.1 MCU.C.21.1 MCU.C.22.1 MCU.C.24.1 MCU.J.1.1 MCU.U.1.4 MCU.U.5.8 MCU.U.5.13 MCU.U.5.19 MCU.U.5.27 MCU.U.5.29 MCU.U.5.30 MCU.U.5.31 MCU.U.5.34 MCU.U.5.36 MCU.U.5.37 MCU.U.5.38 MCU.U.5.40 MCU.U.5.57 MCU.Y.1.2 MCU.Y.1.4 MOS.C.10.1 MOS.C.11.1 MOS.U.2.8 REG.C.12.1 REG.C.13.1 REG.C.14.1 REG.C.16.1 REG.C.17.1 REG.C.18.1 REG.U.3.2 REG.U.4.2 RSN.C.9.1 RSN.C.15.1 RSN.U.6.2 RSN.U.6.3 RSN.U.6.5 RSN.U.7.2 RSN.U.7.3 RSN.U.7.5 USB.J.3.1 USB.J.3.12 USB.J.3.SHELL USB.Ra.1.1 USB.Ra.1.2 USB.Ra.1.3 USB.Ra.1.4 USB.Z.1.2
  other v1: 13.6,-17.8 -17.5,-17 17.9,-17 15.5,-16.8 -15.6,-16.6 -18.4,-15.6 12.9,-15.6 5.4,-15.4 10.1,-15.4 -6.2,-15.2 -15.6,-15.1 -11.9,-15.1 15.5,-15.1 18.2,-14.8 -20.7,-13.4 17.8,-13 -7.3,-12.2 6.7,-12.1 12.9,-11.9 -10,-11.1 -13.9,-9.7 15.8,-9.6 6.9,-7.5 18.8,-7 -8,-6.1 10.3,-5.3 -23.8,-4.6 -19.1,-4.5 23.1,-4 1.2,-3.9 -11.7,-3.1 -2.5,-2.8 -25.5,-0.1 25.7,-0.1 5.6,0.2 18.8,1.2 -24,1.3 -28.3,1.4 23.4,1.4 27.8,1.4 -18.9,1.6 -13.5,2.2 10.3,2.2 2.5,2.3 -9.9,3.6 19.2,3.7 13.5,4 15.7,4 -18.1,4.2 -29.2,6.8 6,6.8 11.6,7.1 29.2,7.3 -22.2,7.5 14.3,8.8 -8.9,8.9 0,10.1 -5.6,10.3 5.3,10.3 -16,10.7 20,10.7 10.4,11.2 -22.5,13.8 -8.5,14.3 -12.3,14.9 7.2,15.2 14.4,15.5 -21.2,16.1 23.7,16.1 -8.6,16.4 -18.4,17.2 -16.9,17.2 -14.2,17.2 -21.2,17.3 19.9,17.6 -8.7,18 -26.7,18.1 27,18.7 -18.5,19.6 10.5,20.1 -7.1,20.7 14.5,21.7 -14,22.1 19.8,22.3 -19.5,22.5 23.5,22.5 17.9,23.8 -18.4,25.2 -26.1,25.8 12,25.8 26.1,25.8 -9.6,25.9 15.6,27.1 -15.3,27.4 -21.3,27.5 19.6,27.9 23.2,29.2 18.2,29.3 -3.6,29.4 4,29.4 -7.3,29.7 -0.6,30.1 -15,30.2 -12.5,30.3 -21.3,30.8 10.5,31.9 -6.1,32.5 -15.1,32.8 4.6,33.1 18.6,33.2 -19.7,33.3 26.3,33.3 2.575,33.625 -9.4,33.8 -25,34.7 -2.1,35 21.6,35 -4,35.1 -20,35.7 -12.2,35.8 15.6,36.4 -7.9,36.5 5.3,36.9 10.85,37.247 13.025,37.5 8.95,38.125 -8.6,38.4 -0.5,38.5 3.6,38.5 19,39 -15.3,39.1 23.4,39.2 7.35,39.225 13.85,39.325 13.8,41.15 9.025,41.9 -22.8,42 -8,42.1 -16,42.3 -0.5,42.5 3.6,42.5 22.8,42.9 13.55,42.95 11.4,43.2 -10.3,43.3 10.075,43.575 8.1,43.6 15.3,43.7 4.8,44.8 -16.8,45.1 8.9,45.3 -7.5,46.3 11.4,47 3.5,48.2 -18.8,48.6 -6.7,48.7 18.7,49.3 -28,50 24,50 -23.3,50.5 9,51.1 24,51.5 -24.5,52 -5.8,52.4 -7.7,52.5 1.1,53.6 2.8,53.6 -11.7,55.6 -16.5,56.1 12.4,56.2 17.2,56.3 -11.7,57.2 14.8,57.8 -13.5,57.9
  other v2: -9.5,-18 9.5,-18 21.5,-18 0,-11.5 -21,-9 22.5,-9 26.5,-3 -27.5,-1 0,5.5 -29.5,13.5 29.5,13.5 -29.5,22.5 29.5,23 29.5,28.5 -29.5,29.5 29.5,37.5 -29.5,38 -21,53.5 21,53.5 -17.4,57.5
LEDData: LED.R.16.2 MCU.U.5.28 | length 26
  Top Layer w0.2: MCU.U.5.28@5.025,43.1 5.96,44.035 cw(c6.6,43.395) 6.6,44.3 10.386,44.3 cw(c10.386,43.873) 10.688,44.175 ccw(c11.352,44.838) 11.017,43.962 ccw(c11.352,44.838) 11.352,43.9 13.288,43.9 ; v1(14.2,36.4) ccw(c12.51,38.09) 14.9,38.09 14.9,42.434 ccw(c13.534,42.434) 14.5,43.4 ccw(c13.293,42.193) 13.318,43.9 ; 13.288,43.9 cw(c13.288,41.457) 13.293,43.9 ; 13.288,43.9 13.293,43.9 ; 13.293,43.9 cw(c13.293,42.193) 13.318,43.9 ; 13.293,43.9 cw(c13.288,41.457) 13.318,43.9
  Top Layer w0.4: v1(12.6,30) 12.603,30.003 LED.R.16.2@14.1,30.003
  Bottom Layer w0.4: v1(12.6,30) 12.6,31.048 12.6,33.748 cw(c15.14,33.748) 13.344,35.544 v1(14.2,36.4)
NetBTN.SW.1_B: BTN.SW.1.B MCU.U.5.41 | length 28.8
  Top Layer w0.2: -19.544,43.256 cw(c-17.748,41.46) -17.748,44 -8.552,44 ccw(c-8.552,46.54) -6.756,44.744 -6,45.5 cw(c-4.793,44.293) -4.793,46 -1.283,46 cw(c-1.283,45.317) -0.8,45.8 cw(c-1.283,45.317) -0.6,45.317 MCU.U.5.41@-0.6,43.925
  Top Layer w0.4: -21.956,40.844 -19.544,43.256
  Top Layer w0.5: BTN.SW.1.B@-25.6,40.1 -23.752,40.1 ccw(c-23.752,42.64) -21.956,40.844
NetBTN.SW.2_B: BTN.SW.2.B MCU.U.5.39 | length 16.7
  Top Layer w0.2: BTN.SW.2.B@-14.2,45.8 ccw(c-12.993,47.007) BTN.SW.2.B@-12.993,45.3 ; -7.283,45.3 ccw(c-7.283,46.466) -6.459,45.641 -6.3,45.8 cw(c-4.851,44.351) -4.851,46.4 -1.024,46.4 cw(c-1.024,45.376) -0.3,46.1 cw(c-1.507,44.893) 0.2,44.893 MCU.U.5.39@0.2,43.925
  Top Layer w0.5: BTN.SW.2.B@-12.993,45.3 -7.283,45.3
NetBTN.SW.3_B: BTN.SW.3.B MCU.U.5.32 | length 27.1
  Top Layer w0.2: MCU.U.5.32@3,43.925 3,44.459 cw(c3.341,44.459) 3.1,44.7 3.188,44.788 ccw(c2.676,45.3) 3.4,45.3 3.4,45.617 cw(c4.083,45.617) 3.6,46.1 cw(c4.083,45.617) 4.083,46.3 8.61,46.3 cw(c8.61,43.91) 10.3,45.6 10.546,45.354 ccw(c12.849,47.656) 12.849,44.4 18.024,44.4 cw(c18.024,40.836) 20.544,43.356 ; BTN.SW.3.B@24.852,40.1 BTN.SW.3.B@26.2,40.1
  Top Layer w0.4: 20.544,43.356 23.056,40.844
  Top Layer w0.5: 23.056,40.844 ccw(c24.852,42.64) BTN.SW.3.B@24.852,40.1
NetBTN.SW.4_B: BTN.SW.4.B MCU.U.5.35 | length 16.1
  Top Layer w0.2: MCU.U.5.35@1.8,43.925 1.8,46 cw(c2.9,46) 2.9,47.1 8.62,47.1 cw(c8.62,44.246) 10.7,46.2
  Top Layer w0.4: 10.7,46.2 ccw(c11.666,47.166) 11.666,45.8
  Top Layer w0.5: 11.666,45.8 BTN.SW.4.B@14.8,45.8
NetBTN.SW.5_A: BTN.SW.5.A MCU.U.5.11 | length 64.2
  Top Layer w0.2: MCU.U.5.11@3,37.075 3,36.332 ccw(c4.527,36.332) 3.447,35.253 8.356,30.344 cw(c6.56,28.548) 9.1,28.548 9.1,25.966 ccw(c12.397,25.966) 10.066,23.634 10.756,22.944 cw(c8.96,21.148) 11.5,21.148 11.5,11.811 cw(c6.404,11.811) 10.008,8.208 9.1,7.3
  Top Layer w0.5: BTN.SW.5.A@-15.8,-7.9 -12.618,-7.9 ccw(c-12.618,7.837) -1.491,-3.291 9.1,7.3